# EAGLE board pcb_univ_3-1-0-x-rev1 (EAGLE 5.11)
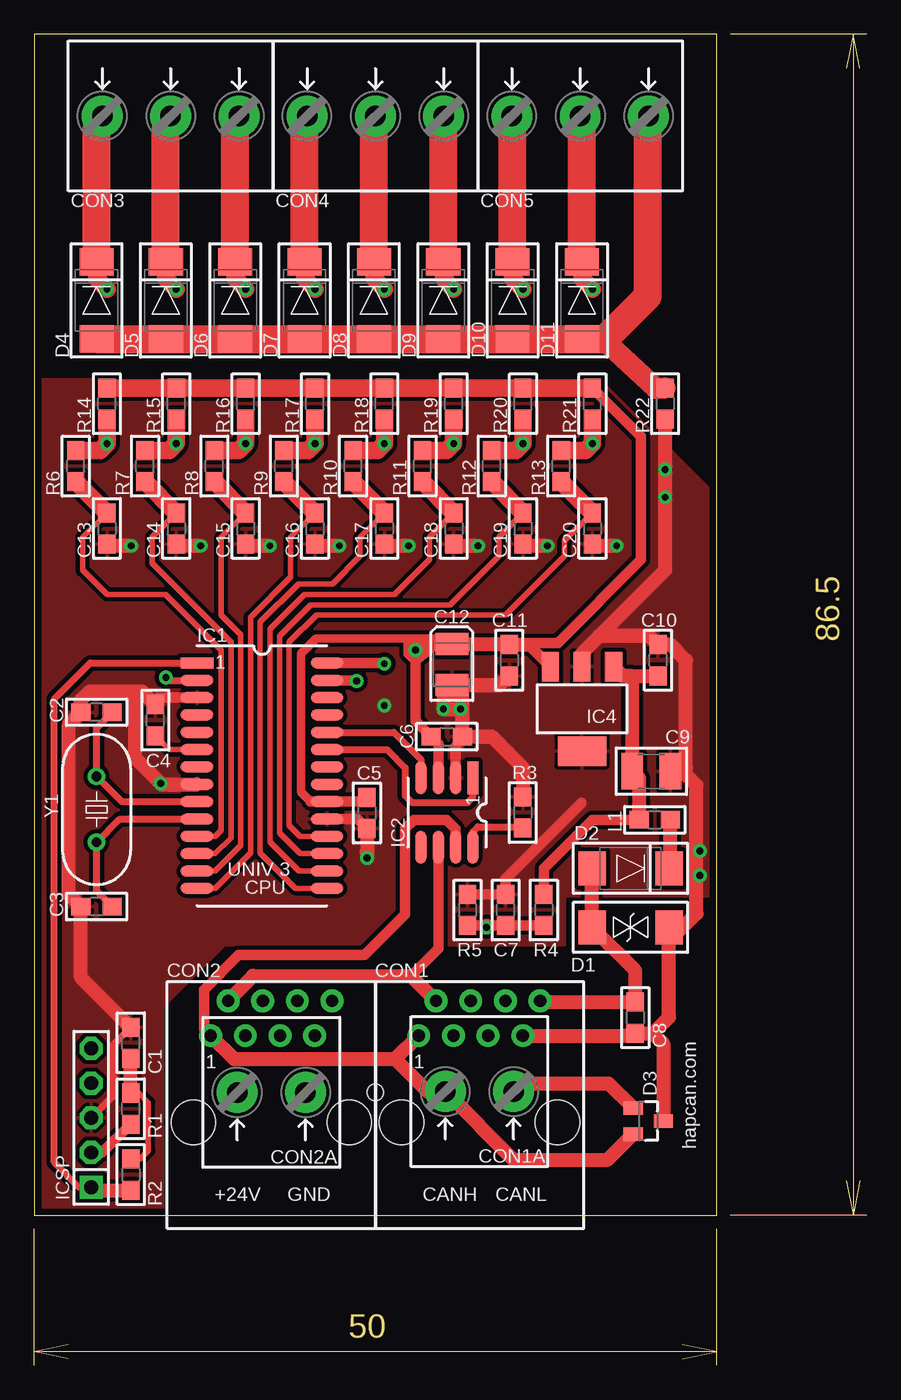
[diagram p0: board, top side]
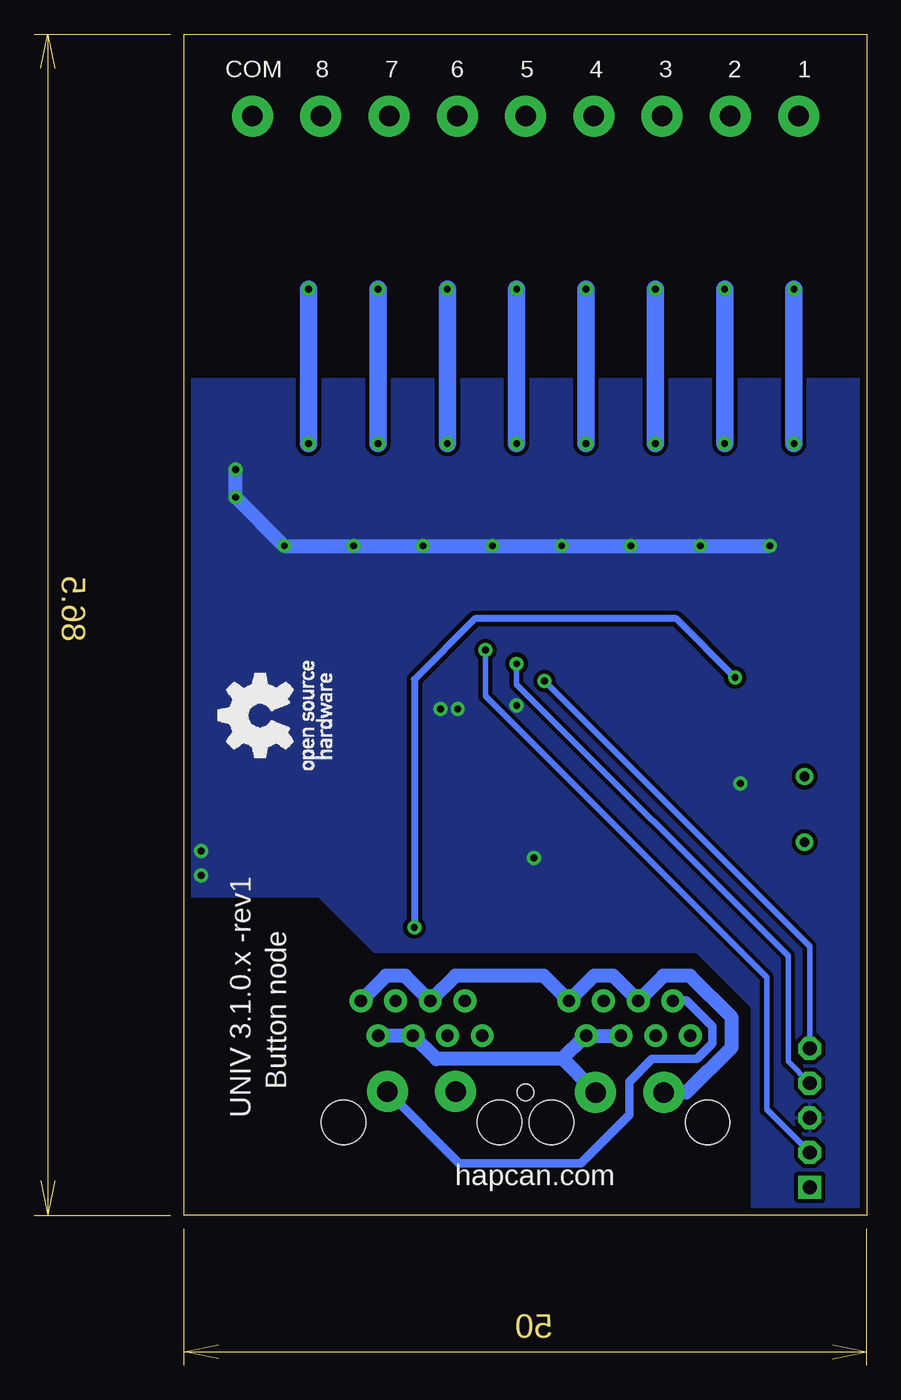
[diagram p1: board, bottom side, seen from below]

Size 61 x 97.5 mm. Coordinates in mm from the lower left corner, seen from the top.
Outline: 60.99,11 61,11 60,11
Outline: 60,11 51,11
Outline: 60,97.5 60,11
Outline: 61,97.5 60,97.5
Outline: 60,97.5 51,97.5
Outline: 60.5,95 60,97.5
Outline: 59.5,13.5 60,11
Outline: 60,97.5 59.5,95
Outline: 60.5,13.5 60,11
Outline: 0,0.01 0,0 0,1
Outline: 0,1 0,10
Outline: 50,1 0,1
Outline: 50,0 50,1
Outline: 50,1 50,10
Outline: 47.5,0.5 50,1
Outline: 2.5,1.5 0,1
Outline: 50,1 47.5,1.5
Outline: 2.5,0.5 0,1
Outline: 0,11 50,11 50,97.5 0,97.5 0,11
Copper layers (1*16): Top 0.035mm / dielectric 1.5mm / Bottom 0.035mm
Design rules "HAPCAN-Drc": minimum track width 10mil, minimum drill 0.5mm, track to track 12mil, track to pad 12mil, pad to pad 12mil, via to via 12mil, smd to smd 10mil, copper to edge 20mil, drill to drill 8mil, minimum pad ring 10mil, minimum via ring 10mil, stop-mask expansion 4mil, vias tented up to drill 0mil, thermal gap 10mil
Holes 1.2 mm at 25,20
tKeepout: 4 lines

## Footprints (pad centres in the part's own frame; a part is rotated, then mirrored left to right if it is on the bottom)
0805 = smd 1.397 x 1.27: 1 -1.143,0; 2 1.143,0
1210 = smd 1.6 x 2.7: 1 -1.4,0; 2 1.4,0
SMC_B = smd 1.6 x 2.4: + -1.5,0; - 1.5,0
RJ45-PCB-SOCKET = drill 0.9 pad 1.676 round: 1 -4.445,6.35; 2 -3.175,8.89; 3 -1.905,6.35; 4 -0.635,8.89; 5 0.635,6.35; 6 1.905,8.89; 7 3.175,6.35; 8 4.445,8.89 | hole 3.251: -5.715,0; 5.715,0
ARK2-5X10,5MM = drill 1.5 pad 3 round: 1 -2.5,0; 2 2.5,0
ARK3-5X10.5MM = drill 1.5 pad 3 round: 1 -5,0; 2 0,0; 3 5,0
DO-214_TRANSIL2@1 = smd 2 x 2.5: A 2.82,0; C -2.82,0
DO-214 = smd 2 x 2.5: A 2.82,0; C -2.82,0
SOT-23 = smd 1 x 1.4: 1 -0.95,-1.1; 2 0.95,-1.1; 3 0,1.1
UNIV3CPU = smd 2.4 x 0.8: 1 -4.763,8.255; 2 -4.763,6.985; 3 -4.763,5.715; 4 -4.763,4.445; 5 -4.763,3.175; 6 -4.763,1.905; 7 -4.763,0.635; 8 -4.763,-0.635; 9 -4.763,-1.905; 10 -4.763,-3.175; 11 -4.763,-4.445; 12 -4.763,-5.715; 13 -4.763,-6.985; 14 -4.763,-8.255; 15 4.763,-8.255; 16 4.763,-6.985; 17 4.763,-5.715; 18 4.763,-4.445; 19 4.763,-3.175; 20 4.763,-1.905; 21 4.763,-0.635; 22 4.763,0.635; 23 4.763,1.905; 24 4.763,3.175; 25 4.763,4.445; 26 4.763,5.715; 27 4.763,6.985; 28 4.763,8.255
SO-08 = smd 2.4 x 0.8: 1 -2.54,1.905; 2 -2.54,0.635; 3 -2.54,-0.635; 4 -2.54,-1.905; 5 2.54,-1.905; 6 2.54,-0.635; 7 2.54,0.635; 8 2.54,1.905
SOT-223 = smd 1.27 x 2.159: 1 -2.311,-3.099; 2 0,-3.099; 3 2.311,-3.099 | smd 3.556 x 2.159: 4 0,3.099
SIP-5 = drill 1.016 pad 1.676 square: 1 -5.08,0 | drill 1.016 pad 1.676 octagon: 2 -2.54,0; 3 0,0; 4 2.54,0; 5 5.08,0
CRYSTAL-HC49V = drill 0.7 pad 1.27 round: 1 -2.413,0; 2 2.413,0

## Placement (x,y rotation side)
C1  100n  [0805]  7.08,23.63 90 top
C2  22p  [0805]  4.57,47.83 180 top
C3  22p  [0805]  4.57,33.61 180 top
C4  10u/6V  [0805]  8.88,47.25 90 top
C5  100n  [0805]  24.38,40.46 270 top
C6  100n  [0805]  30.23,46.05 0 top
C7  100n  [0805]  34.54,33.35 90 top
C8  100n  [0805]  44.04,25.47 270 top
C9  10u/50V  [1210]  45.21,43.51 0 top
C10  100n  [0805]  45.71,51.64 90 top
C11  100n  [0805]  34.81,51.64 270 top
C12  10u/6V  [SMC_B]  30.61,51.32 270 top
C13  100n  [0805]  5.33,61.29 270 top
C14  100n  [0805]  10.41,61.29 270 top
C15  100n  [0805]  15.49,61.29 270 top
C16  100n  [0805]  20.57,61.29 270 top
C17  100n  [0805]  25.65,61.29 270 top
C18  100n  [0805]  30.73,61.29 270 top
C19  100n  [0805]  35.81,61.29 270 top
C20  100n  [0805]  40.89,61.29 270 top
CON1  [RJ45-PCB-SOCKET]  32.62,17.8 0 top
CON1A  TERMINAL-2  [ARK2-5X10,5MM]  32.62,20.06 180 top
CON2  [RJ45-PCB-SOCKET]  17.38,17.8 0 top
CON2A  TERMINAL-2  [ARK2-5X10,5MM]  17.38,19.99 180 top
CON3  TERMINAL-3  [ARK3-5X10.5MM]  10,91.5 0 top
CON4  TERMINAL-3  [ARK3-5X10.5MM]  25,91.5 0 top
CON5  TERMINAL-3  [ARK3-5X10.5MM]  40,91.5 0 top
D1  P6SMB33CA  [DO-214_TRANSIL2@1]  43.69,32.08 180 top
D2  S1D  [DO-214]  43.69,36.4 180 top
D3  PESD2CAN  [SOT-23]  44.98,17.9 270 top
D4  P6SMB6.8A  [DO-214]  4.57,78 270 top
D5  P6SMB6.8A  [DO-214]  9.65,78 270 top
D6  P6SMB6.8A  [DO-214]  14.73,78 270 top
D7  P6SMB6.8A  [DO-214]  19.81,78 270 top
D8  P6SMB6.8A  [DO-214]  24.89,78 270 top
D9  P6SMB6.8A  [DO-214]  29.97,78 270 top
D10  P6SMB6.8A  [DO-214]  35.05,78 270 top
D11  P6SMB6.8A  [DO-214]  40.13,78 270 top
IC1  UNIV 3 (CPU)  [UNIV3CPU]  16.7,43.19 0 top
IC2  MCP2551  [SO-08]  30.24,40.49 270 top
IC4  MCP1790  [SOT-223]  40.13,48.08 180 top
ICSP  [SIP-5]  4.18,18.13 90 top
L1  BLM21A102SPT  [0805]  45.47,39.96 0 top
R1  10k  [0805]  7.08,18.8 90 top
R2  470R  [0805]  7.08,13.97 270 top
R3  4k7  [0805]  35.8,40.49 270 top
R4  51k 1%  [0805]  37.34,33.35 270 top
R5  10k 1%  [0805]  31.75,33.35 270 top
R6  470R  [0805]  3.05,65.86 90 top
R7  470R  [0805]  8.13,65.86 90 top
R8  470R  [0805]  13.21,65.86 90 top
R9  470R  [0805]  18.29,65.86 90 top
R10  470R  [0805]  23.37,65.86 90 top
R11  470R  [0805]  28.45,65.86 90 top
R12  470R  [0805]  33.53,65.86 90 top
R13  470R  [0805]  38.61,65.86 90 top
R14  10k  [0805]  5.33,70.44 90 top
R15  10k  [0805]  10.41,70.44 90 top
R16  10k  [0805]  15.49,70.44 90 top
R17  10k  [0805]  20.57,70.44 90 top
R18  10k  [0805]  25.65,70.44 90 top
R19  10k  [0805]  30.73,70.44 90 top
R20  10k  [0805]  35.81,70.44 90 top
R21  10k  [0805]  40.89,70.44 90 top
R22  10R  [0805]  46.23,70.44 270 top
Y1  8MHz  [CRYSTAL-HC49V]  4.57,40.72 270 top

## Library data of the parts
C1-C20 CON1 CON1A CON2 CON2A CON3-CON5 D1-D11 IC1 IC2 IC4 ICSP L1 R1-R22 Y1 = HAPCAN_devices - UNIV3

## Nets
+5V: C5.1 C6.1 C11.1 C12.+ IC1.20 IC2.3 IC4.3 ICSP.2 R1.1 R14.2 R15.2 R16.2 R17.2 R18.2 R19.2 R20.2 R21.2
GND: C1.2 C2.2 C3.2 C4.2 C5.2 C6.2 C7.2 C8.2 C9.2 C10.2 C11.2 C12.- C13.2 C14.2 C15.2 C16.2 C17.2 C18.2 C19.2 C20.2 CON1.5 CON1.7 CON2.5 CON2.7 CON2A.1 D1.C D3.3 IC1.3 IC1.8 IC1.19 IC2.2 IC4.2 IC4.4 ICSP.3 R3.1 R5.1 R22.2
N$1: CON5.3 D4.A D5.A D6.A D7.A D8.A D9.A D10.A D11.A R22.1
N$2: IC1.24 IC2.4
N$3: IC1.23 IC2.1
N$4: CON1.1 CON1A.2 CON2.1 D3.2 IC2.7
N$5: CON3.1 D4.C R6.2 R14.1
N$6: CON3.3 D6.C R8.2 R16.1
N$7: C1.1 R1.2 R2.1
N$8: IC1.1 ICSP.1 R2.2
N$9: C8.1 CON1.4 CON1.8 CON2.4 CON2.8 CON2A.2 D1.A D2.A
N$10: IC1.28 ICSP.4
N$11: C14.1 IC1.12 R7.1
N$12: IC2.8 R3.2
N$13: CON3.2 D5.C R7.2 R15.1
N$14: IC1.27 ICSP.5
N$15: C3.1 IC1.10 Y1.2
N$16: C7.1 IC1.2 R4.2 R5.2
N$17: C9.1 C10.1 IC4.1 L1.1 R4.1
N$19: C15.1 IC1.13 R8.1
N$21: CON4.1 D7.C R9.2 R17.1
N$22: C16.1 IC1.14 R9.1
N$23: CON4.3 D9.C R11.2 R19.1
N$24: CON5.1 D10.C R12.2 R20.1
N$25: C13.1 IC1.11 R6.1
N$27: CON1.2 CON1A.1 CON2.2 D3.1 IC2.6
N$29: C17.1 IC1.15 R10.1
N$30: CON4.2 D8.C R10.2 R18.1
N$32: CON5.2 D11.C R13.2 R21.1
N$40: C2.1 IC1.9 Y1.1
N$45: C18.1 IC1.16 R11.1
N$46: C19.1 IC1.17 R12.1
N$47: C20.1 IC1.18 R13.1
N$56: C4.1 IC1.6
N$67: D2.C L1.2

## Tracks (layer width: path | path; a pad name or v marks a point on that pad's centre or on a via)
+5V  (via drill 0.5 pad 1.02)
  Top 0.61: 20.26,41.29 19.56,41.99 19.56,52.15 20.65,53.24 27.86,53.24 arc-90 27.94,53.16
  Top 0.762: 20.26,41.29 IC1.20 24.07,41.29 C5.1 | 30.52,52.91 C12.+ | 29.21,53.16 27.94,53.16 v27.94,52.4 | 29.21,53.16 29.72,53.16 30.52,52.91 | 30.52,52.91 38.35,52.91 44.45,59.01 44.45,68.02 R21.2 | 27.94,51.64 27.94,47.2 C6.1 29.61,45.53 IC2.3 | 27.43,52.78 27.43,52.15 27.94,51.64 | 27.94,51.64 29.21,52.66 29.21,53.16 | 29.21,53.16 28.19,52.4 v27.94,52.4 | v27.94,52.4 27.69,52.4 | v27.94,52.4 28.19,52.66 27.69,52.66 v27.94,52.4 | v27.94,52.4 28.19,52.15 27.94,51.89 | 27.94,51.89 27.94,51.64 | v27.94,52.4 27.94,51.89 | R1.1 5,15.6 ICSP.2
  Top 0.813: IC4.3 36.22,52.78 C11.1
  Top 1.016: 36.15,52.78 C11.1 34.77,52.82 C12.+
  Top 1.27: R14.2 R15.2 R16.2 R17.2 R18.2 R19.2 R20.2 R21.2
  Bottom 0.406: v27.94,52.4 27.94,49.02 7.34,28.42 7.34,18.75 ICSP.2
GND  (via drill 0.5 pad 1.02)
  Top 0.508: C1.2 5.82,23.5 5.82,19.77 ICSP.3
  Top 0.762: IC2.2 30.88,45.3 C6.2 | IC1.3 9.14,48.91 C4.2 | R5.1 C7.2 34.54,35.64 40.1,41.19 | IC1.19 23.68,40.02 C5.2 | v9.27,42.62 9.34,42.69 9.34,42.56
  Top 1.016: v12.19,60.02 10.54,60.02 C14.2 | v7.11,60.02 5.46,60.02 C13.2 | v17.27,60.02 15.62,60.02 C15.2 | v22.35,60.02 20.7,60.02 C16.2 | v27.43,60.02 25.78,60.02 C17.2 | v32.51,60.02 30.86,60.02 C18.2 | v37.59,60.02 35.94,60.02 C19.2 | v42.67,60.02 41.02,60.02 C20.2 | R22.2 v46.23,63.58 46.23,58.24 41.4,53.42 | 34.81,50.23 C11.2 34.13,49.82 C12.- 31.37,49.06 | 41.4,53.42 40.1,52.11 | 41.4,53.42 45.07,53.42 C10.2 46.61,52.78 47.75,51.64 47.75,43.77 47.5,43.51 | 45.33,24.32 C8.2 43.1,24.15 CON1.7 | 45.33,24.32 46.51,25.5 D1.C 46.76,31.83 47.24,31.83 48.51,33.1 48.51,42.5 47.5,43.51 | 47.5,43.51 C9.2 | 31.37,49.06 C6.2 33.53,46.05 35.8,43.78 R3.1 | D3.3 46.08,23.57 45.33,24.32 | 7.37,49.35 4.06,49.35 3.43,48.72 C2.2 2.54,46.94 2.54,34.5 C3.2 3.43,28.42 C1.2 | IC1.8 9.34,42.56 7.37,44.53 7.37,49.35 | C5.2 24.38,37.67 v24.38,37.16 | v31.24,48.08 v29.97,48.08 29.97,49.1 31.37,49.1 31.37,49.06 | C4.2 7.93,49.35 7.37,49.35
  Bottom 1.016: v7.11,60.02 v12.19,60.02 v17.27,60.02 v22.35,60.02 v27.43,60.02 v32.51,60.02 v37.59,60.02 v42.67,60.02 v46.23,63.58 v46.23,65.61 | 22.35,22.43 22.27,22.43 20.09,20.25 CON2A.1 | 22.35,22.43 31.54,22.43 CON1.5 CON1.7 | CON2.5 CON2.7 20.63,24.15 22.35,22.43
  other vias: 48.77,37.67 48.77,35.89 25.65,48.34
  pour Bottom (isolate 0.305, rank 6): 0,11 8.38,11 8.38,26.24 12.45,30.3 36.07,30.3 40.13,34.37 50.04,34.37 50.04,72.21 0,72.21
  pour Top (isolate 0.305): 0,72.21 41.4,72.21 50.04,63.58 50.04,34.37 38.86,34.37 38.86,30.81 13.97,30.81 9.4,26.24 9.4,11 0,11
N$1
  Top 1.524: R22.1 45.53,71.56 41.66,75.18
  Top 1.93: 44.96,90.96 CON5.3
  Top 2.032: 44.96,90.96 44.96,78.31 41.83,75.18 41.66,75.18 D11.A D10.A D9.A D8.A D7.A D6.A D4.A D5.A
N$2
  Top 0.508: IC2.4 28.34,44.38 26.36,46.37 IC1.24
N$3
  Top 0.508: IC2.1 32.15,41.62 31.75,41.23 27.69,41.23 27.18,41.73 27.18,43.77 25.85,45.1 IC1.23
N$4
  Top 0.762: IC2.7 30.88,39.3 30.23,39.96 27.81,39.96 27.18,39.32 27.18,33.01 24.22,30.05 14.99,30.05 12.45,27.51 12.45,24.64 CON2.1
  Top 1.016: D3.2 42,15.06 35.11,15.06 CON1A.2 28.83,20.06 26.45,22.43 | 26.45,22.43 CON1.1 | 26.45,22.43 14.65,22.43 CON2.1
N$5  (via drill 0.5 pad 1.02)
  Top 1.27: R6.2 4.83,67.01 v5.33,67.52 R14.1 | D4.C 4.57,79.58 v5.33,78.82
  Top 2.032: D4.C 4.57,90.57 CON3.1
  Bottom 1.27: v5.33,67.52 v5.33,78.82
N$6  (via drill 0.5 pad 1.02)
  Top 1.27: R8.2 14.99,67.01 v15.49,67.52 R16.1 | D6.C 14.73,79.58 v15.49,78.82
  Top 2.032: D6.C 14.73,90.73 CON3.3
  Bottom 1.27: v15.49,67.52 v15.49,78.82
N$7
  Top 0.406: R1.2 7.66,19.94 8.36,19.24 8.36,15.72 7.76,15.12 R2.1
  Top 1.016: R1.2 C1.1
N$8
  Top 0.508: IC1.1 4.12,51.45 1.47,48.8 1.47,14.86 3.28,13.06 ICSP.1
  Top 1.016: R2.2 4.12,12.83 ICSP.1
N$9
  Top 1.016: D2.A D1.A 44.04,28.91 C8.1 37.15,26.61 CON1.8
  Bottom 1.016: CON1.8 35.23,28.53 33.82,28.53 CON1.4 30.15,28.53 23.66,28.53 CON2.8 19.99,28.53 18.58,28.53 CON2.4 14.91,28.53 12.95,28.53 9.91,25.48 9.91,23.29 13.23,19.99 CON2A.2 14.63,19.99
N$10  (via drill 0.5 pad 1.02)
  Top 0.762: IC1.28 25.59,51.45 v25.65,51.39
  Bottom 0.406: v25.65,51.39 25.65,49.86 5.77,29.97 5.77,22.25 ICSP.4
N$11
  Top 0.406: IC1.12 13.27,37.48 14.43,38.64 14.43,52.96 8.64,58.75 8.64,60.66 C14.1
  Top 1.27: C14.1 R7.1
N$12
  Top 0.406: 35.7,39.45 R3.2
  Top 0.508: IC2.8 32.15,39.08 32.51,39.45 35.7,39.45
N$13  (via drill 0.5 pad 1.02)
  Top 1.27: R7.2 9.91,67.01 v10.41,67.52 R15.1 | D5.C 9.65,79.58 v10.41,78.82
  Top 2.032: D5.C 9.65,90.65 CON3.2
  Bottom 1.27: v10.41,67.52 v10.41,78.82
N$14  (via drill 0.5 pad 1.02)
  Top 0.762: IC1.27 23.31,50.18 v23.62,50.12
  Bottom 0.406: v23.62,50.12 4.18,30.67 ICSP.5
N$15
  Top 0.508: IC1.10 6.28,40.02 Y1.2 4.57,34.75 C3.1
N$16  (via drill 0.5 pad 1.02)
  Top 0.508: IC1.2 9.85,50.18 v9.65,50.37
  Top 0.762: R5.2 33.15,32.21 C7.1 R4.2
  Top 1.016: v33.15,32.08 33.15,32.21
  Bottom 0.508: v9.65,50.37 13.97,54.69 28.7,54.69 33.15,50.24 v33.15,32.08
N$17
  Top 0.762: R4.1 37.34,36.4 40.89,39.96 L1.1
  Top 1.016: 43.69,50.5 43.18,50.5 43.13,50.5 | 43.13,50.5 43.05,50.5 | 43.69,50.5 C10.1 | L1.1 44.32,43 C9.1 43.81,50.37 43.69,50.5 | 43.13,50.5 IC4.1
N$19
  Top 0.406: IC1.13 13.27,36.21 15.14,38.08 15.14,53.52 13.72,54.94 13.72,60.66 C15.1
  Top 1.27: C15.1 R8.1
N$21  (via drill 0.5 pad 1.02)
  Top 1.27: R9.2 20.07,67.01 v20.57,67.52 R17.1 | D7.C 19.81,79.58 v20.57,78.82
  Top 2.032: D7.C 19.81,90.81 CON4.1
  Bottom 1.27: v20.57,67.52 v20.57,78.82
N$22
  Top 0.406: IC1.14 13.27,34.94 15.85,37.52 15.85,54.79 18.8,57.74 18.8,60.66 C16.1
  Top 1.27: C16.1 R9.1
N$23  (via drill 0.5 pad 1.02)
  Top 1.27: R11.2 30.23,67.01 v30.73,67.52 R19.1 | D9.C 29.97,79.58 v30.73,78.82
  Top 2.032: D9.C 29.97,90.97 CON4.3
  Bottom 1.27: v30.73,67.52 v30.73,78.82
N$24  (via drill 0.5 pad 1.02)
  Top 1.27: R12.2 35.31,67.01 v35.81,67.52 R20.1 | D10.C 35.05,79.58 v35.81,78.82
  Top 2.032: D10.C 35.05,90.95 CON5.1
  Bottom 1.27: v35.81,67.52 v35.81,78.82
N$25
  Top 0.406: IC1.11 13.27,38.75 13.72,39.19 13.72,52.4 9.65,56.47 5.33,56.47 3.56,58.24 3.56,60.66 C13.1
  Top 1.27: C13.1 R6.1
N$27
  Top 0.406: CON1.2 30.03,26.69
  Top 0.762: IC2.6 29.61,30.52 27.61,28.53
  Top 1.016: D3.1 42.08,20.65 35.72,20.65 CON1A.1 | CON2.2 16.04,28.53 27.61,28.53 CON1.2
  Bottom 0.61: CON1A.1 29.87,14.81 20.95,14.81 17.4,18.37 17.4,20.78 15.75,22.43 12.45,22.43 11.3,23.57 11.3,24.84 13.21,26.75 14.15,26.75 CON2.2
N$29
  Top 0.406: IC1.15 19.14,34.94 16.56,37.52 16.56,54.43 19.36,57.23 21.84,57.23 23.88,59.26 23.88,60.66 C17.1
  Top 1.27: C17.1 R10.1
N$30  (via drill 0.5 pad 1.02)
  Top 1.27: R10.2 25.15,67.01 v25.65,67.52 R18.1 | D8.C 24.89,79.58 v25.65,78.82
  Top 2.032: D8.C 24.89,90.89 CON4.2
  Bottom 1.27: v25.65,67.52 v25.65,78.82
N$32  (via drill 0.5 pad 1.02)
  Top 1.27: R13.2 40.39,67.01 v40.89,67.52 R21.1 | D11.C 40.13,79.58 v40.89,78.82
  Top 2.032: D11.C 40.13,90.87 CON5.2
  Bottom 1.27: v40.89,67.52 v40.89,78.82
N$40
  Top 0.508: IC1.9 6.42,41.29 Y1.1 4.57,46.69 C2.1
N$45
  Top 0.406: IC1.16 19.39,36.21 17.27,38.33 17.27,53.93 19.81,56.47 26.42,56.47 28.96,59.01 28.96,60.66 C18.1
  Top 1.27: C18.1 R11.1
N$46
  Top 0.406: IC1.17 19.5,37.48 17.98,38.99 17.98,53.42 20.27,55.7 30.48,55.7 34.04,59.26 34.04,60.66 C19.1
  Top 1.27: C19.1 R12.1
N$47
  Top 0.406: IC1.18 19.5,38.75 18.69,39.55 18.69,52.96 20.68,54.94 34.54,54.94 38.86,59.26 38.86,60.4 C20.1
  Top 1.27: C20.1 R13.1
N$56
  Top 0.406: IC1.6 9.9,45.1 C4.1
N$67
  Top 1.016: D2.C 46.61,36.5 L1.2

## Text on the board
Dimension: 86.5 | 50
tPlace: hapcan.com | +24V | GND | CANH | CANL
bPlace: 1 | 2 | 3 | 4 | 5 | 6 | 7 | 8 | COM | UNIV 3.1.0.x -rev1 | Button node | hapcan.com